# EAGLE board TM1637-board (EAGLE 9.1.0)
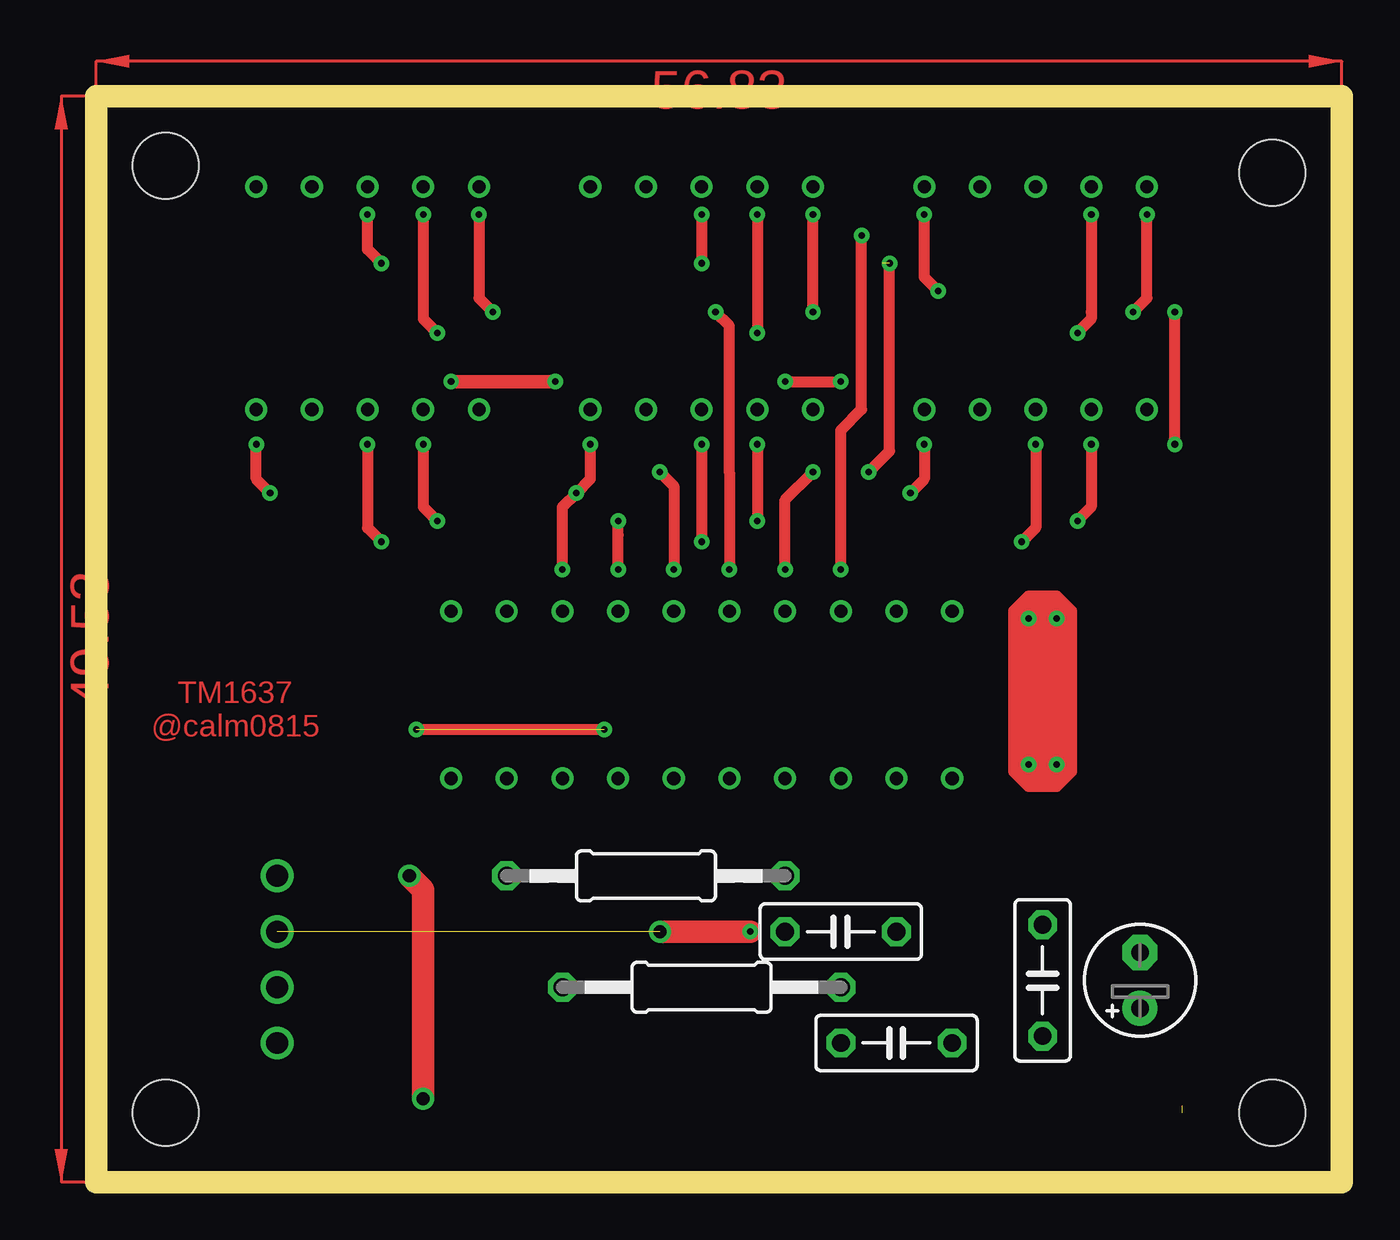
[diagram p0: board, top side]
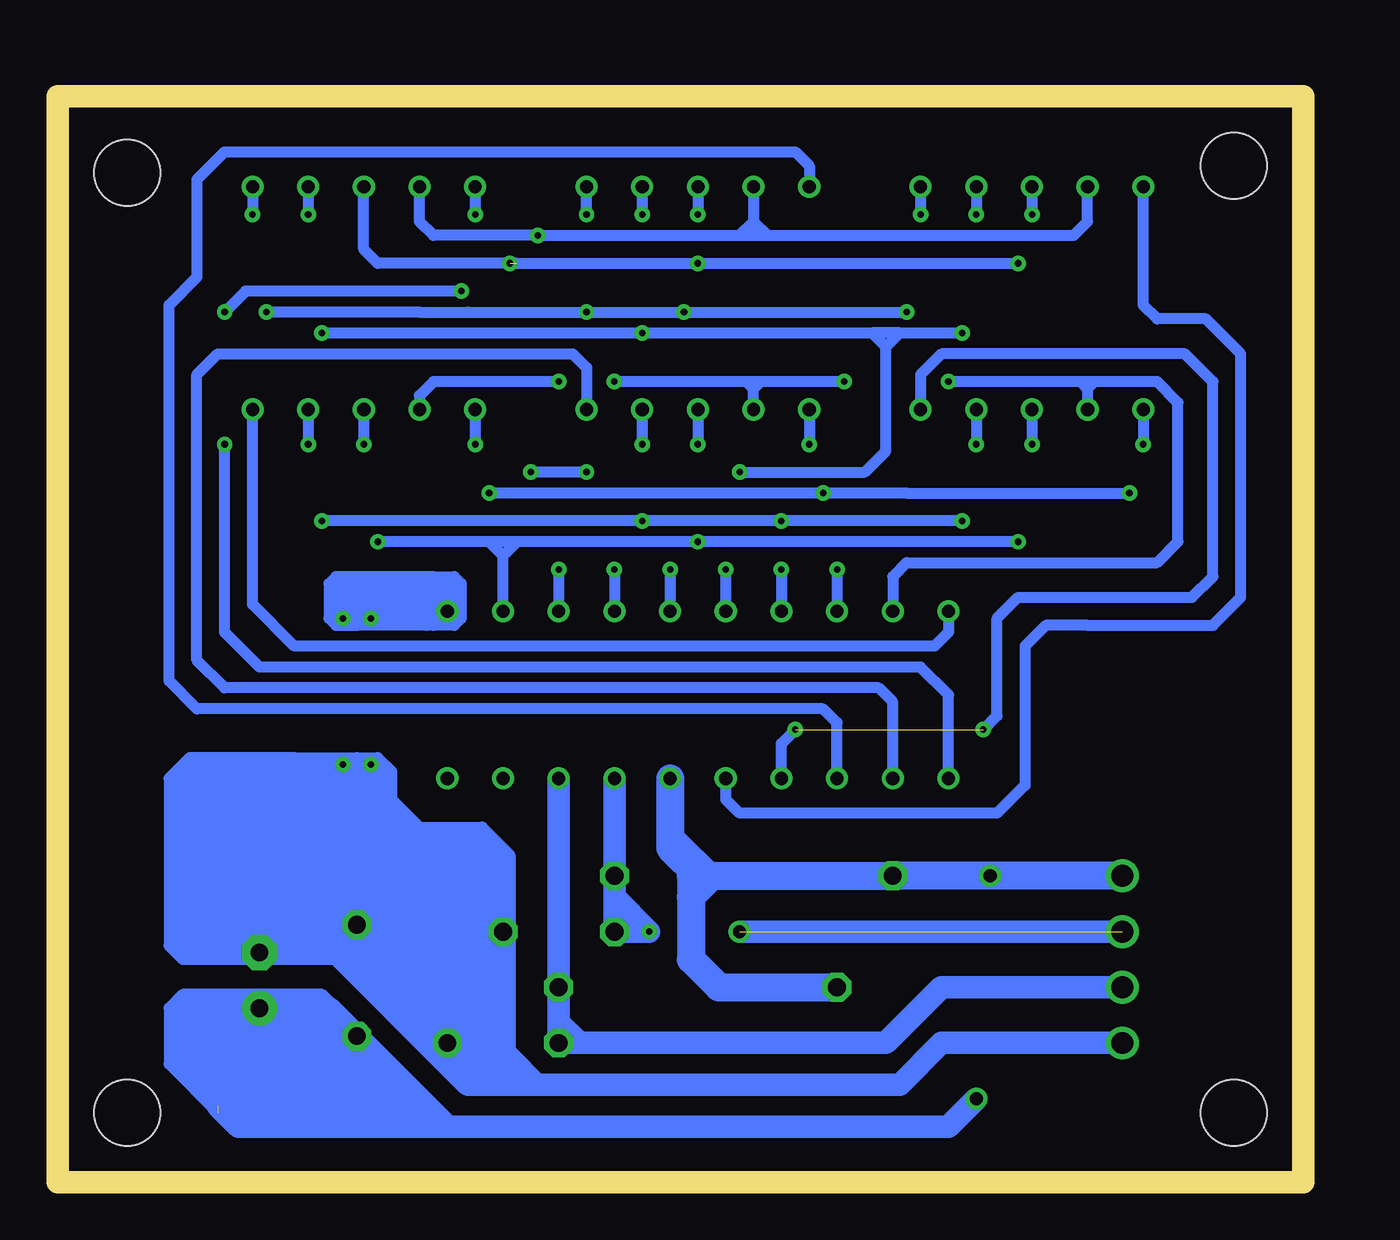
[diagram p1: board, bottom side, seen from below]

Size 56.83 x 49.53 mm. Coordinates in mm from the lower left corner, seen from the top.
Outline: 0,0 56.83,0 56.83,49.53 0,49.53 0,0
Copper layers (1*16): Top 0.035mm / dielectric 1.5mm / Bottom 0.035mm
Design rules "default": minimum track width 6mil, minimum drill 0.35mm, track to track 6mil, track to pad 6mil, pad to pad 6mil, via to via 6mil, smd to smd 6mil, copper to edge 40mil, drill to drill 6mil, minimum pad ring 10mil, minimum via ring 8mil, stop-mask expansion 4mil, vias tented up to drill 0mil, thermal gap 10mil
Holes 3 mm at 3.18,46.36 3.18,3.18 53.66,46.04 53.66,3.18

## Footprints (pad centres in the part's own frame; a part is rotated, then mirrored left to right if it is on the bottom)
0207/12 = drill 0.813 octagon: 1 -6.35,0; 2 6.35,0
C050-025X075 = drill 0.813 octagon: 1 -2.54,0; 2 2.54,0
E2,5-5 = drill 0.813 pad 1.6: + -1.27,0 | drill 0.813 pad 1.6 octagon: - 1.27,0

## Placement (x,y rotation side)
E$1  [0207/12]  27.62,8.89 180 top
E$3  [0207/12]  25.08,13.97 180 top
E$4  [C050-025X075]  43.18,9.21 270 top
E$5  [E2,5-5]  47.62,9.21 90 top
E$6  [C050-025X075]  33.97,11.43 180 top
E$7  [C050-025X075]  36.51,6.35 180 top

## Library data of the parts
E$1 E$3 = rcl
E$4 E$6 E$7 = ref-packages-longpad
E$5 = ref-packages

## Nets
S$9: E$7.2
S$15: E$4.2 E$5.+
S$21: E$1.2 E$3.2
S$34: E$6.2
S$66: E$5.- E$6.1 E$7.1

## Tracks (layer width: path | path; a pad name or v marks a point on that pad's centre or on a via)
S$1
  Top 0.508: 13.02,41.91 12.38,42.55 12.38,44.13
S$2  (via drill 0.3, 0.6)
  Top 0.508: v21.27,27.94 21.27,30.8 v21.91,31.43 22.54,32.07 v22.54,33.65
  Bottom 0.508: v21.27,27.94 v21.27,26.04 | v22.54,35.24 v22.54,33.65
S$3
  Bottom 0.508: 39.69,27.62 40.32,27.62 | 40.32,27.62 44.13,27.62 44.45,27.3 44.45,25.72 44.13,25.4 43.5,25.4 43.18,25.4 40,25.4 | 39.69,25.4 40,25.4 | 40.32,27.62 38.74,27.62 38.42,27.3 38.42,25.72 38.74,25.4 40,25.4
S$4  (via drill 0.6)
  Bottom 0.508: v21.27,18.41 21.27,20.95 21.91,21.59 50.48,21.59 51.75,22.86 51.75,40.01 50.48,41.27 50.48,45.72 49.21,46.99 23.18,46.99 22.54,46.36 v22.54,45.4
S$5  (via drill 0.3, 0.6)
  Top 0.508: v33.97,27.94 33.97,34.29 34.93,35.24 v34.93,43.18
  Bottom 0.508: v33.97,27.94 v33.97,26.04 | v40.32,45.4 40.32,43.81 39.69,43.18 v34.93,43.18 25.72,43.18 | 25.72,43.18 25.08,43.18 | 25.08,43.18 24.45,43.18 | 24.45,43.18 10.48,43.18 9.84,43.81 v9.84,45.4 | v25.08,45.4 25.08,43.81 | 25.08,43.81 25.08,43.18 | 25.08,43.81 24.45,43.18 | 25.08,43.81 25.72,43.18
S$6  (via drill 0.3)
  other vias: 23.81,30.16
S$7  (via drill 0.3)
  other vias: 15.56,38.73
S$8  (via drill 0.6)
  Bottom 0.508: v18.73,18.41 18.73,21.91 19.37,22.54 49.21,22.54 50.48,23.81 50.48,36.83 49.53,37.78 33.34,37.78 32.7,37.15 32.7,35.24
S$9  (via drill 0.6, 1)
  Bottom 0.508: 33.97,6.67 E$7.2
  Bottom 1.016: v33.97,18.41 33.97,7.3 | 33.97,7.3 33.97,6.67 | E$7.2 33.02,6.35 | 33.02,6.35 19.05,6.35 16.51,8.89 v8.25,8.89 | 33.02,6.35 33.97,7.3
S$10  (via drill 0.6)
  Bottom 0.508: 9.53,36.51 9.21,36.51 6.67,36.51 5.71,35.56 5.71,29.21 6.67,28.26 18.1,28.26 18.73,27.62 v18.73,26.04 | 9.53,36.51 9.84,36.19 | 9.84,36.19 v9.84,35.24 | 9.53,36.51 10.16,36.51 | 10.16,36.51 16.19,36.51 | 9.84,36.19 10.16,36.51
S$11  (via drill 0.6)
  Bottom 0.508: v27.62,45.4 27.62,44.13
S$12  (via drill 0.3)
  Top 0.508: 37.78,44.13 37.78,41.27 v38.42,40.64
  Bottom 0.508: v38.42,40.64 48.26,40.64 v49.21,39.69
S$13  (via drill 0.3, 0.6)
  Top 0.508: v32.7,32.38 31.43,31.12 v31.43,27.94
  Bottom 0.508: v31.43,27.94 v31.43,26.04 | v32.7,32.38 v35.24,32.38
S$14  (via drill 0.3, 0.6)
  Top 0.508: v31.43,36.51 v33.97,36.51
  Bottom 0.508: v20.96,36.51 24.76,36.51 | 24.76,36.51 25.4,36.51 | 25.4,36.51 v31.43,36.51 | v33.97,36.51 39.05,36.51 39.69,36.51 40.32,35.88 v40.32,35.24 | v25.08,35.24 25.08,36.19 | 25.08,36.19 24.76,36.51 | 25.08,36.19 25.4,36.51
S$15  (via drill 0.6)  (1 unrouted)
  Top 1.016: v14.29,13.97 14.92,13.33 v14.92,3.81
  Bottom 0.508: 39.05,2.54 E$4.2 44.45,7.94 44.77,7.94 E$5.+ 48.58,7.94 49.21,7.3 49.21,3.17 48.58,2.54 | 44.13,7.94 44.77,8.57 51.12,8.57 51.75,7.94 51.75,5.4 49.53,3.17
  Bottom 1.016: 39.05,2.54 40,2.54 48.58,2.54 49.53,3.49 | v14.92,3.81 16.19,2.54 17.78,2.54 39.05,2.54 | 48.58,7.94 44.77,7.94 44.45,7.94 39.05,2.54
S$16  (via drill 0.3, 0.6)
  Top 0.508: v37.15,31.43 37.78,32.07 v37.78,33.65
  Bottom 0.508: v37.78,35.24 v37.78,33.65 | 7.94,31.43 18.1,31.43 v37.15,31.43
S$17  (via drill 0.3, 0.6)
  Top 0.508: v30.16,44.13 v30.16,38.73
  Bottom 0.508: v30.16,45.4 v30.16,44.13
S$18
  Top 0.61: 42.86,26.67 43.82,26.67 44.45,26.04 44.45,18.73 43.82,18.1 42.86,18.1 42.55,18.1 41.91,18.73 41.91,26.04 42.55,26.67 42.86,26.67
S$19  (via drill 0.25, 0.3, 0.6)
  Top 0.508: v45.4,44.13 45.4,39.69 45.4,39.37 v44.77,38.73 | v26.35,27.94 26.35,31.75 v25.72,32.38
  Bottom 0.508: v45.4,45.4 v45.4,44.13 | v44.77,38.73 20,38.73 19.68,38.73 | v26.35,27.94 v26.35,26.04 | v25.72,32.38 20,32.38 19.05,33.34 19.05,38.1 | 19.05,38.1 18.42,38.73 | 18.42,38.73 18.1,38.73 15.56,38.73 | 19.68,38.73 19.05,38.1 | 18.42,38.73 19.68,38.73
S$20  (via drill 0.3)
  other vias: 28.26,39.69
S$21  (via drill 0.6, 1)
  Bottom 1.016: 26.99,13.97 28.57,15.56
  Bottom 1.27: v28.89,18.41 28.89,15.24 27.62,13.97 | 27.62,13.97 27.94,13.97 27.94,10.16 26.67,8.89 E$1.2 | v8.25,13.97 E$3.2 26.99,13.97 | 26.99,13.97 27.94,13.02 | 27.62,13.97 26.99,13.97
S$22  (via drill 0.6)
  Bottom 0.508: v12.38,45.4 12.38,44.13
S$23  (via drill 0.6)
  other vias: 39.05,26.04
S$24  (via drill 0.6)
  other vias: 32.7,35.24
S$25  (via drill 0.3, 0.6)
  Top 0.508: v7.94,31.43 7.3,32.07 v7.3,33.65
  Bottom 0.508: v7.3,35.24 v7.3,33.65
S$26  (via drill 0.6)
  other vias: 47.94,45.4
S$27  (via drill 0.3)
  other vias: 42.55,25.72
S$28  (via drill 0.6)
  Bottom 0.508: 7.3,41.91 7.3,42.55 | 7.3,42.55 v7.3,45.4 | v26.35,18.41 26.35,17.46 25.72,16.83 25.4,16.83 13.97,16.83 12.7,18.1 12.7,24.45 11.75,25.4 9.84,25.4 4.13,25.4 2.86,26.67 2.86,37.78 4.44,39.37 6.67,39.37 7.3,40.01 7.3,42.55
S$29
  Top 0.508: 27.62,44.13 27.62,41.91
S$30  (via drill 0.6, 1)  (1 unrouted)
  Top 1.016: 29.85,11.43 27.31,11.43 v25.72,11.43
  Bottom 1.016: v25.72,11.43 v8.25,11.43
S$31  (via drill 0.3, 0.6)
  Top 0.508: v45.4,33.65 45.4,30.8 v44.77,30.16
  Bottom 0.508: v45.4,35.24 v45.4,33.65 | v15.56,30.16 v44.77,30.16
S$32  (via drill 0.3)
  other vias: 36.19,41.91
S$34  (via drill 0.3, 0.6)
  Bottom 1.016: v31.43,18.41 31.43,13.02 | 31.43,13.02 31.43,12.38 | 31.43,12.38 E$6.2 | E$6.2 30.16,11.43 30.48,11.43 31.43,12.38 | E$6.2 v29.85,11.43 31.43,13.02
S$35  (via drill 0.25, 0.3, 0.6)
  Top 0.508: 28.26,39.69 28.89,39.05 28.89,32.38 v28.89,27.94
  Bottom 0.508: v28.89,27.94 v28.89,26.04
S$36  (via drill 0.3)
  other vias: 43.81,25.72
S$37  (via drill 0.3)
  Top 0.61: v16.19,36.51 20.96,36.51
S$38  (via drill 0.6)
  other vias: 36.51,18.41
S$39  (via drill 0.6)
  Bottom 0.508: v16.19,26.04 16.19,25.08 16.83,24.45 46.04,24.45 47.94,26.35 47.94,33.97 v47.94,35.24
S$41
  Top 2.54: 43.18,25.4 43.18,19.37
S$43  (via drill 0.6)
  other vias: 39.05,18.41
S$44  (via drill 0.3)
  other vias: 42.55,19.05
S$45  (via drill 0.3)
  Bottom 0.508: 47.94,45.4 v47.94,44.13
S$46  (via drill 0.3, 0.6)
  Top 0.508: v12.38,33.65 12.38,29.84 v13.02,29.21 | v42.86,33.65 42.86,29.84 v42.23,29.21
  Bottom 0.508: v12.38,35.24 v12.38,33.65 | v13.02,29.21 35.56,29.21 35.88,29.21 | 35.88,29.21 36.51,28.58 | v36.51,26.04 36.51,28.58 | v42.86,35.24 v42.86,33.65 | 36.51,28.58 37.15,29.21 | 37.15,29.21 37.47,29.21 v42.23,29.21 | 35.88,29.21 37.15,29.21
S$47  (via drill 0.3)
  other vias: 27.62,41.91
S$48  (via drill 0.3, 0.6)
  Top 0.508: v27.62,33.65 v27.62,29.21
  Bottom 0.508: v27.62,35.24 v27.62,33.65
S$49  (via drill 0.3, 0.6)
  Top 0.508: v14.92,33.65 14.92,30.8 15.56,30.16
  Bottom 0.508: v14.92,35.24 v14.92,33.65
S$50  (via drill 0.3, 0.6)
  Top 0.508: v47.31,39.69 47.94,40.32 47.94,44.13 | v17.46,44.13 17.46,40.32 v18.1,39.69
  Bottom 0.508: v17.46,45.4 v17.46,44.13 | v47.31,39.69 40.32,39.69 38.1,39.69 v18.1,39.69
S$51  (via drill 0.3, 0.6)
  Top 0.508: v14.92,44.13 14.92,39.37 15.56,38.73
  Bottom 0.508: v14.92,45.4 v14.92,44.13
S$52  (via drill 0.3, 0.6)
  Bottom 0.508: v37.78,45.4 v37.78,44.13
S$53  (via drill 0.3, 0.6)
  Top 0.508: v30.16,33.65 v30.16,30.16
  Bottom 0.508: v30.16,35.24 v30.16,33.65
S$54  (via drill 0.3)
  other vias: 43.81,19.05
S$57  (via drill 0.3)
  other vias: 12.38,44.13
S$58  (via drill 0.3)
  other vias: 27.62,44.13
S$60  (via drill 0.3, 0.6)  (1 unrouted)
  Top 0.508: v23.18,20.64 v14.61,20.64
  Bottom 0.508: v23.18,20.64 23.81,20 v23.81,18.41 | v17.46,35.24 17.46,36.83 16.51,37.78 5.4,37.78 4.13,36.51 4.13,27.62 5.08,26.67 13.02,26.67 13.97,25.72 13.97,21.27 v14.61,20.64
S$62  (via drill 0.3)
  other vias: 13.02,41.91
S$66  (via drill 1)
  Bottom 0.508: 36.19,11.43 36.19,14.92 37.47,16.19 40.32,16.19 41.59,17.46 41.59,18.73 42.23,19.37 43.18,19.37 46.04,19.37 | 36.19,11.43 36.19,6.03 34.61,4.44 | 40,6.35 E$7.1 36.51,6.35 | 40,6.35 44.13,10.48 E$5.- | 46.35,19.37 46.04,19.37 | 36.19,11.43 E$6.1 | 40,6.35 38.1,4.44 | 46.04,19.37 50.8,19.37 51.75,18.41 51.75,10.8 51.12,10.16 44.13,10.16
  Bottom 1.016: v8.25,6.35 16.51,6.35 18.42,4.44 34.61,4.44 38.1,4.44 44.45,10.8
S$68  (via drill 0.6)  (1 unrouted)
  Top 0.508: 35.24,32.38 36.19,33.34 36.19,41.91
  Bottom 0.508: v42.86,45.4 42.86,42.55 42.23,41.91 35.88,41.91 28.26,41.91 13.02,41.91
S$71  (via drill 0.3, 0.6)
  Top 0.508: v23.81,27.94 23.81,29.53 23.81,30.16
  Bottom 0.508: v23.81,27.94 v23.81,26.04
S$73  (via drill 0.3, 0.6)
  Top 0.508: v32.7,39.69 v32.7,44.13
  Bottom 0.508: v32.7,44.13 v32.7,45.4
S$130  (via drill 0.3, 0.6)
  Top 0.508: v49.21,33.65 49.21,39.69
  Bottom 0.508: v16.19,18.41 16.19,22.23 17.46,23.5 47.63,23.5 49.21,25.08 v49.21,33.65
(copper drawn outside any net)
  shapes: Bottom area x79, Top area x2

## Text on the board
Top: TM1637 / @calm0815